# EAGLE board Mateusz.Płonka (EAGLE 9.6.2)
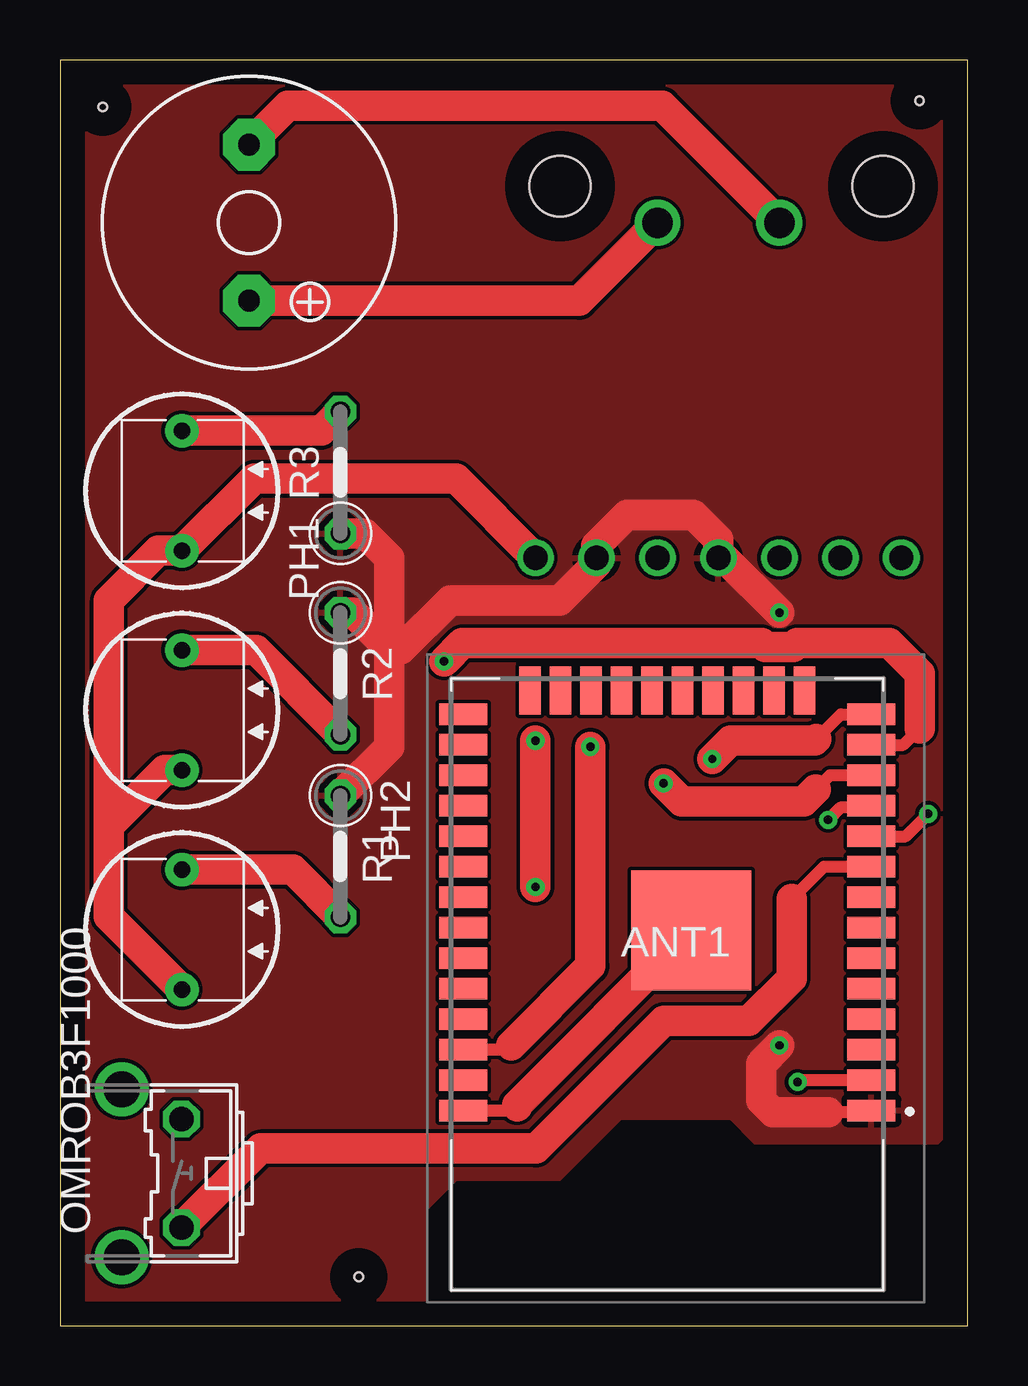
[diagram p0: board, top side]
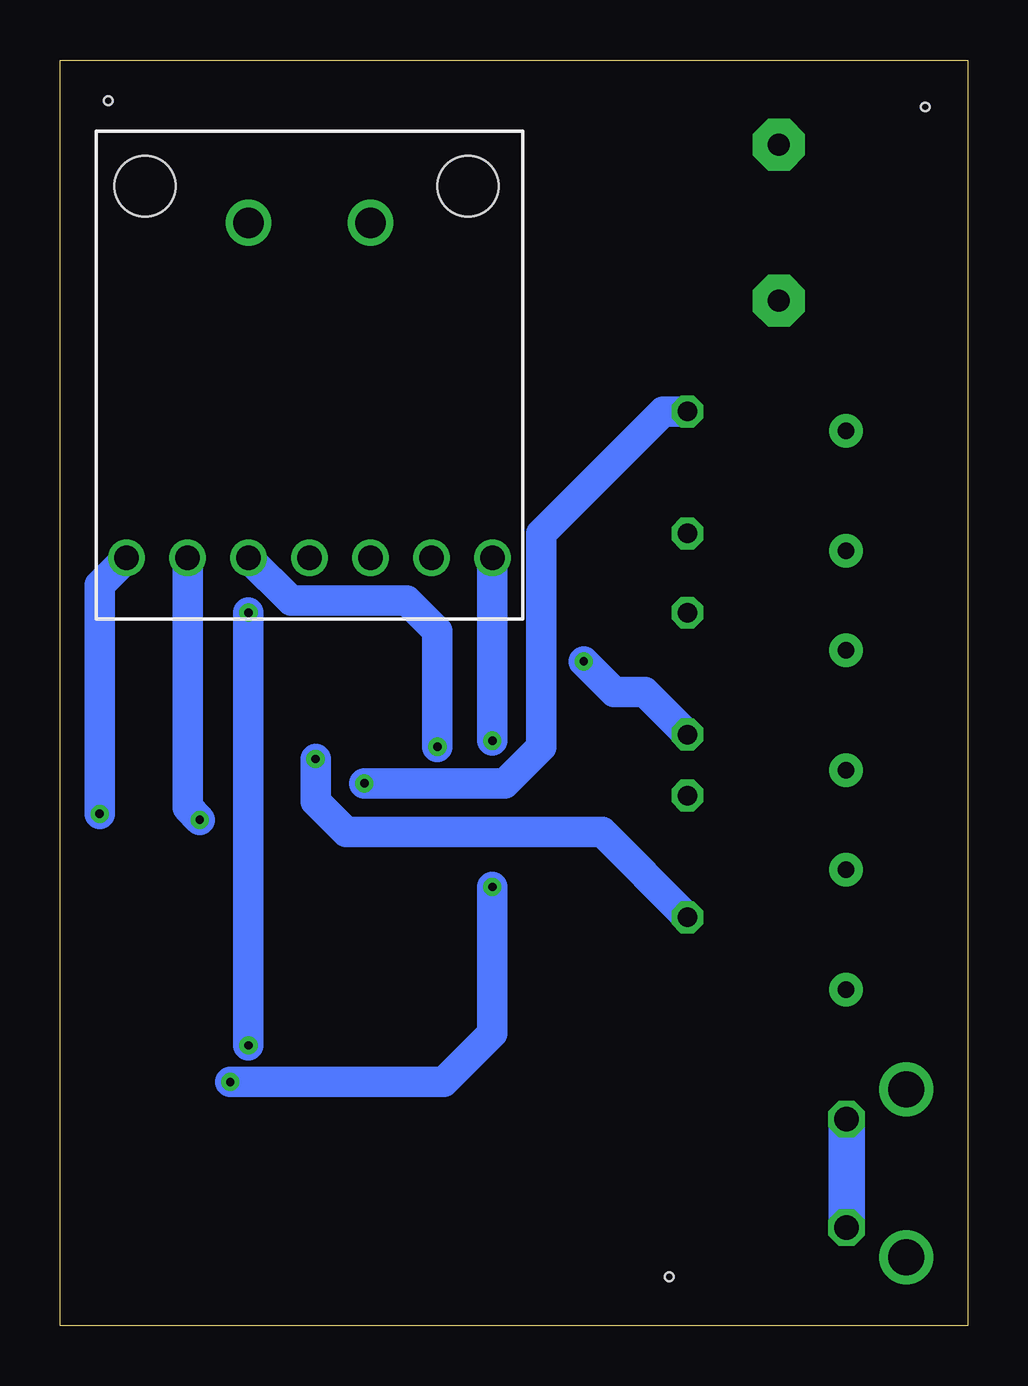
[diagram p1: board, bottom side, seen from below]

Size 37.83 x 52.76 mm. Coordinates in mm from the lower left corner, seen from the top.
Outline: 0,0 37.83,0 37.83,52.76 0,52.76 0,0
Copper layers (1*16): Top 0.035mm / dielectric 1.5mm / Bottom 0.035mm
Design rules "default": minimum track width 6mil, minimum drill 0.35mm, track to track 6mil, track to pad 6mil, pad to pad 6mil, via to via 6mil, smd to smd 6mil, copper to edge 40mil, drill to drill 6mil, minimum pad ring 10mil, minimum via ring 8mil, stop-mask expansion 4mil, vias tented up to drill 0mil, thermal gap 10mil
Holes 0.35 mm at 1.78,50.8 35.81,51.05 12.45,2.03

## Footprints (pad centres in the part's own frame; a part is rotated, then mirrored left to right if it is on the bottom)
ESP32WROOM32D = smd 2 x 0.9: 1 -8.15,5.51; 2 -8.15,4.24; 3 -8.15,2.97; 4 -8.15,1.7; 5 -8.15,0.43; 6 -8.15,-0.84; 7 -8.15,-2.11; 8 -8.15,-3.38; 9 -8.15,-4.65; 10 -8.15,-5.92; 11 -8.15,-7.19; 12 -8.15,-8.46; 13 -8.15,-9.73; 14 -8.15,-11; 25 8.85,-11; 26 8.85,-9.73; 27 8.85,-8.46; 28 8.85,-7.19; 29 8.85,-5.92; 30 8.85,-4.65; 31 8.85,-3.38; 32 8.85,-2.11; 33 8.85,-0.84; 34 8.85,0.43; 35 8.85,1.7; 36 8.85,2.97; 37 8.85,4.24; 38 8.85,5.51 | smd 0.9 x 2: 15 -5.365,-12; 16 -4.095,-12; 17 -2.825,-12; 18 -1.555,-12; 19 -0.285,-12; 20 0.985,-12; 21 2.255,-12; 22 3.525,-12; 23 4.795,-12; 24 6.065,-12 | smd 5 x 5: 39 -0.65,-1.99
B3F-31XX = drill 1.016 octagon: 1 -2.261,-1.245; 2 2.261,-1.245 | drill 1.499 pad 2.159: 3 -3.505,1.245; 4 3.505,1.245
D11XX = drill 0.7 pad 1.4: 1 -2.5,0; 2 2.5,0
0207/5V = drill 0.813 octagon: 1 -2.54,0; 2 2.54,0
KSS1201 = drill 0.914 pad 2.159 octagon: + 3.251,0; - -3.251,0
KRZYSZTOF.KOCOT_ADAFRUIT-MAX98357-BREAKOUT_MICROBUILDER_QFN16_3MM = drill 1.016: P$1 -3.81,-12.7; P$2 -1.27,-12.7; P$3 1.27,-12.7; P$4 3.81,-12.7; P$5 6.35,-12.7; P$6 8.89,-12.7; P$7 11.43,-12.7 | drill 1.27: P$8 1.27,1.27; P$9 6.35,1.27 | hole 2.54: -3.048,2.794; 10.414,2.794

## Placement (x,y rotation side)
ANT1  ESP32-WROOM-32D  [ESP32WROOM32D]  25.65,14.48 180 top
OMROB3F1000  [B3F-31XX]  3.81,6.35 90 top
PH1  D1160_12  [D11XX]  5.08,34.8 90 top
PH2  D1160_12  [D11XX]  5.08,25.65 90 top
PH3  D1160_12  [D11XX]  5.08,16.51 90 top
R1  10k  [0207/5V]  11.68,19.56 270 top
R2  10k  [0207/5V]  11.68,27.18 270 top
R3  10k  [0207/5V]  11.68,35.56 90 top
SP1  [KSS1201]  7.87,45.97 270 top
U1  [KRZYSZTOF.KOCOT_ADAFRUIT-MAX98357-BREAKOUT_MICROBUILDER_QFN16_3MM]  31.24,44.7 0 bottom

## Library data of the parts
ANT1 = ESP32-WROOM-32D; DESCRIPTION: WiFi Modules (802.11) SMD Module, ESP32-D0WD, 32Mbits SPI flash, UART mode, PCB antenna; HEIGHT: 3.1mm; MANUFACTURER_NAME: Espressif; MANUFACTURER_PART_NUMBER: ESP32-WROOM-32D; MOUSER_PART_NUMBER: 356-ESP32WROOM-32D
OMROB3F1000 = switch-omron; MPN: B3F-3100; OC_FARNELL: 959704; OC_NEWARK: 36M3582
PH1-PH3 = photo-elements
R1-R3 = rcl; SPICEPREFIX: R
SP1 = buzzer; OC_FARNELL: unknown; OC_NEWARK: unknown
U1 = Krzysztof.Kocot

## Nets
CLK: ANT1.20
CMD: ANT1.19
EN: ANT1.3
GND: ANT1.1 R1.1 R2.1 R3.1 U1.P$4 U1.P$6
IO0: ANT1.25
IO2: ANT1.24
IO4: ANT1.26
IO5: ANT1.29
IO12: ANT1.14 PH3.2 R1.2
IO13: ANT1.16
IO14: ANT1.13 PH2.2 R2.2
IO15: ANT1.23
IO16: ANT1.27
IO17: ANT1.28
IO18: ANT1.30
IO19: ANT1.31
IO21: ANT1.33
IO22: ANT1.36 U1.P$3
IO23: ANT1.37
IO25: ANT1.10 U1.P$1
IO26: ANT1.11 U1.P$2
IO27: ANT1.12 PH1.2 R3.2
IO32: ANT1.8
IO33: ANT1.9 OMROB3F1000.1 OMROB3F1000.2
IO34: ANT1.6
IO35: ANT1.7
N$4: SP1.- U1.P$8
N$5: SP1.+ U1.P$9
N$7: ANT1.38 ANT1.39
N$19: ANT1.15
NC: ANT1.32
RXD0: ANT1.34
SD0: ANT1.21
SD1: ANT1.22
SD2: ANT1.17
SD3: ANT1.18
SENSOR_VN: ANT1.5
SENSOR_VP: ANT1.4
TXD0: ANT1.35
VCC: ANT1.2 PH1.1 PH2.1 PH3.1 U1.P$7

## Tracks (layer width: path | path; a pad name or v marks a point on that pad's centre or on a via)
GND  (via drill 0.35)
  Top 0.508: ANT1.1 33.73,8.89 32,8.89
  Top 1.27: R1.1 13.72,24.13 13.72,28.19 | 13.72,28.19 13.72,32 12.7,33.02 R3.1 | 13.72,28.19 12.19,29.72 R2.1 | 13.72,28.19 14.22,28.19 16.26,30.23 20.83,30.23 22.35,31.75 U1.P$6 22.35,32.51 23.62,33.78 26.42,33.78 27.43,32.77 U1.P$4 27.69,32 v29.97,29.72 | 32,8.89 29.72,8.89 29.21,9.4 29.21,10.92 v29.97,11.68
  Bottom 1.27: v29.97,29.72 v29.97,11.68
  pour Top: 2.03,54.61 0.76,54.61 -1.27,52.58 -1.27,0.51 0.76,-1.52 13.97,-1.52 15.24,-0.25 15.24,4.83 16.51,6.1 20.83,6.1 23.37,8.64 27.94,8.64 28.96,7.62 36.58,7.62 38.1,9.14 39.88,10.92 39.88,52.83 38.1,54.61
IO12  (via drill 0.35)
  Top 0.508: ANT1.14 32.53,25.48 31.52,24.46
  Top 1.27: PH3.2 9.69,19.01 R1.2 | 31.52,24.46 31.44,24.38 27.94,24.38 v27.18,23.62
  Bottom 1.27: R1.2 15.24,20.57 25.91,20.57 27.18,21.84 v27.18,23.62
IO14  (via drill 0.35)
  Top 0.508: ANT1.13 35.13,24.21 35.81,24.89
  Top 1.27: PH2.2 8.17,28.15 R2.2 | v16,27.69 16.76,28.45 29.23,28.45 29.38,28.3 30.56,28.3 30.71,28.45 34.54,28.45 35.81,27.18 35.81,24.89
  Bottom 1.27: R2.2 13.46,26.42 14.73,26.42 v16,27.69
IO22  (via drill 0.35)
  Top 0.508: ANT1.36 18.62,11.51 18.8,11.68
  Top 1.27: 18.8,11.68 22.1,14.99 v22.1,24.13
  Bottom 1.27: v22.1,24.13 22.1,28.96 23.37,30.23 28.19,30.23 U1.P$3
IO25  (via drill 0.35)
  Top 0.508: ANT1.10 35.24,20.4 v36.17,21.34
  Bottom 1.27: U1.P$1 36.17,30.88 v36.17,21.34
IO26  (via drill 0.35)
  Top 0.508: ANT1.11 33.73,21.59 32.51,21.59 v32,21.08
  Bottom 1.27: U1.P$2 32.51,21.59 v32,21.08
IO27  (via drill 0.35)
  Top 0.508: ANT1.12 32.08,22.94 31.5,22.35
  Top 1.27: PH1.2 10.88,37.3 R3.2 | v25.15,22.61 25.91,21.84 30.99,21.84 31.5,22.35
  Bottom 1.27: v25.15,22.61 19.3,22.61 17.78,24.13 17.78,33.02 12.7,38.1 R3.2
IO33
  Top 0.508: ANT1.9 31.83,19.13 30.48,17.78
  Top 1.27: OMROB3F1000.1 8.36,7.39 19.84,7.39 25.15,12.7 28.7,12.7 30.48,14.48 30.48,17.78
  Bottom 1.524: OMROB3F1000.1 OMROB3F1000.2
N$4
  Top 1.27: U1.P$8 25.09,50.85 9.5,50.85 SP1.-
N$5
  Top 1.27: U1.P$9 21.64,42.72 SP1.+
N$7
  Top 0.508: ANT1.38 18.87,8.97 19.05,9.14
  Top 1.27: ANT1.39 19.05,9.21 19.05,9.14
VCC  (via drill 0.35)
  Top 0.508: v30.73,10.16 30.81,10.24 ANT1.2
  Top 1.27: PH3.1 2.03,17.06 2.03,20.83 | 2.03,20.83 2.03,30.23 4.1,32.3 PH1.1 8.09,35.31 16.51,35.31 U1.P$7 | 2.03,20.83 4.36,23.15 PH2.1 | v19.81,24.38 v19.81,18.29
  Bottom 1.27: U1.P$7 v19.81,24.38 | v19.81,18.29 19.81,12.19 21.84,10.16 v30.73,10.16